# Altium PCB 19 CAN转接板.PcbDoc
Units mil, origin at the board's own origin, x right, y up, seen from the top; angles counter-clockwise.
Board outline 1291.02 x 1512.03 mil, 2 copper layers (Top Layer, Bottom Layer); 64 components, 83 nets, 240 pads, 115 vias.
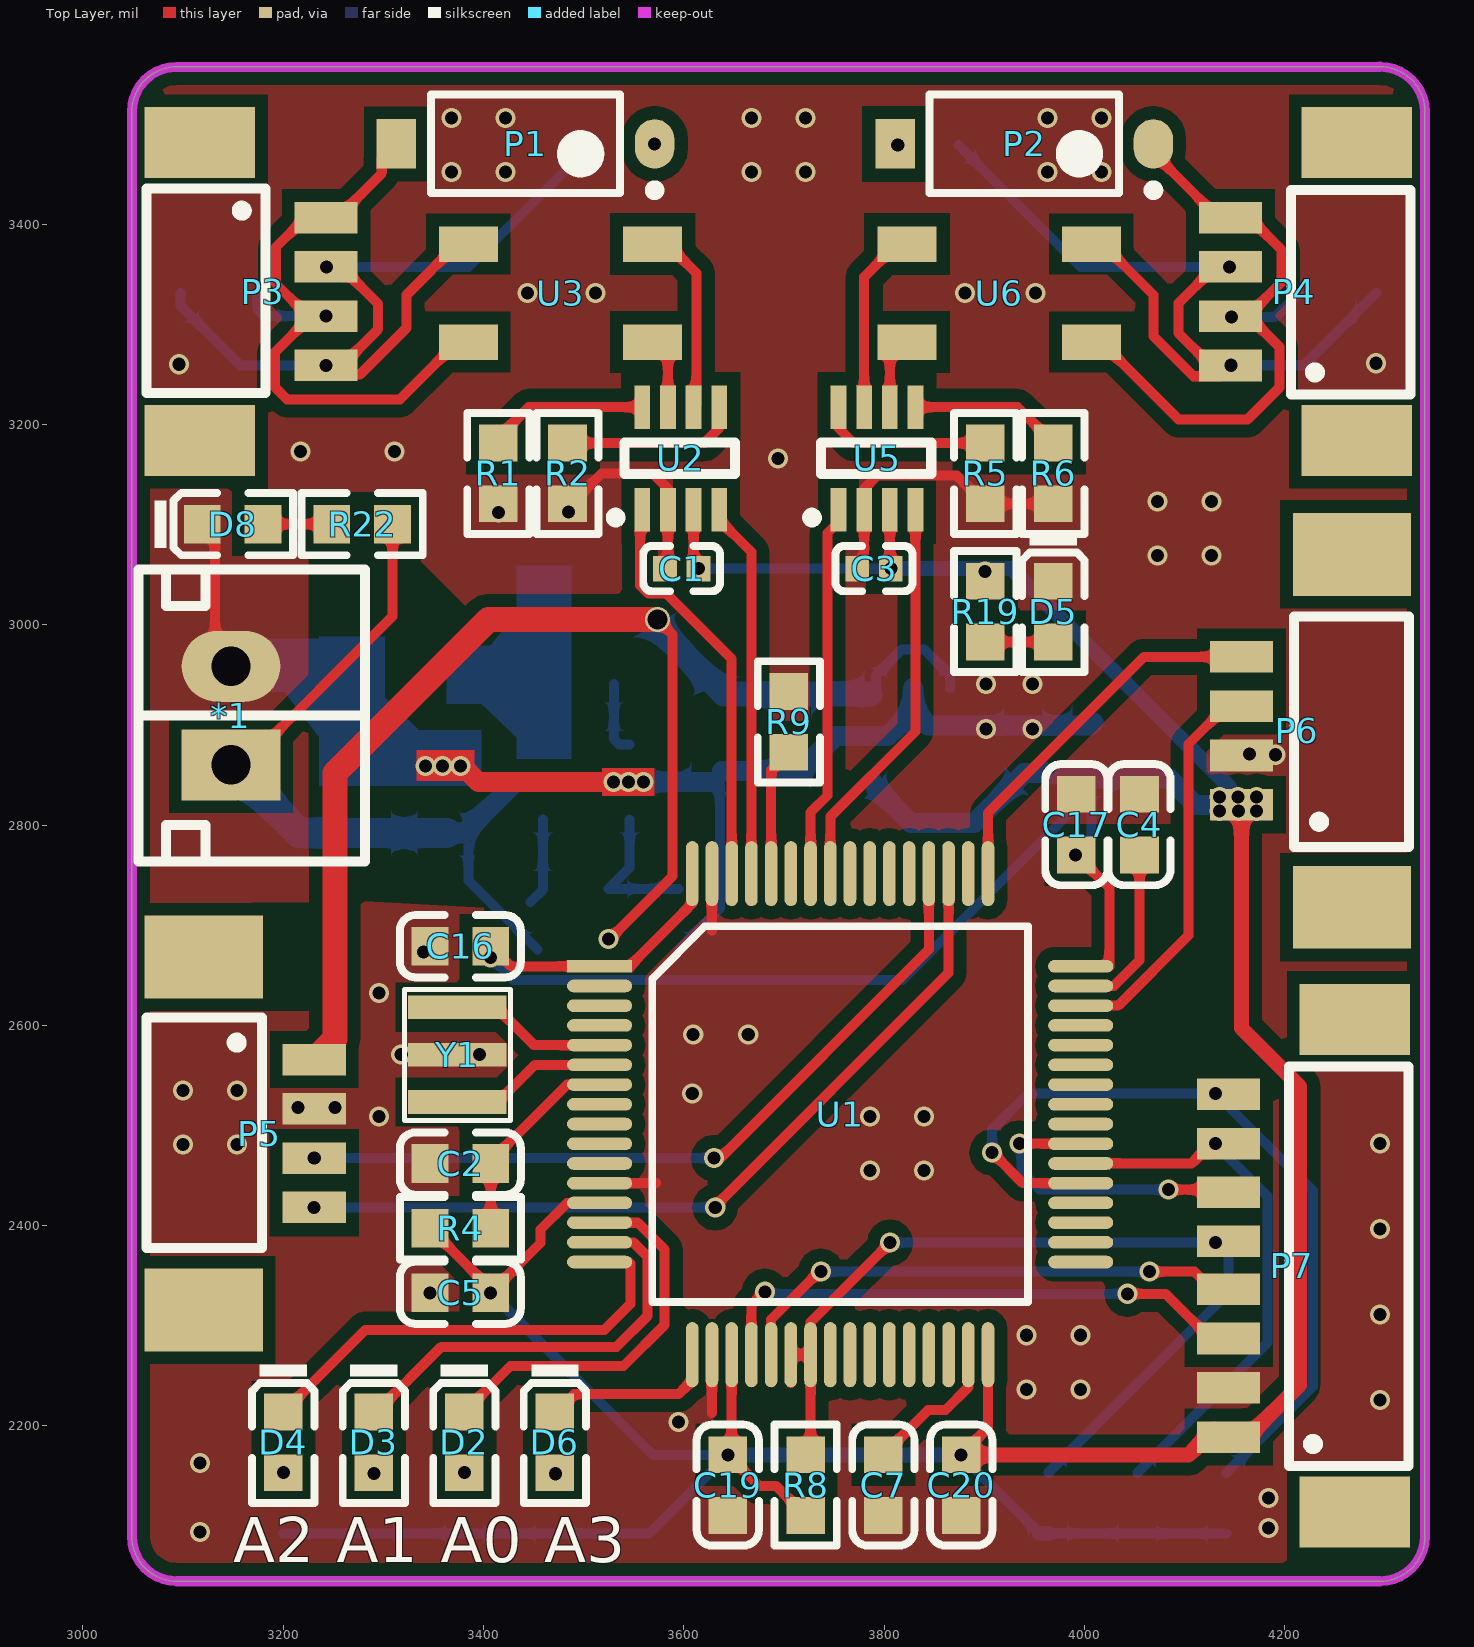
[diagram p0: Top Layer view]
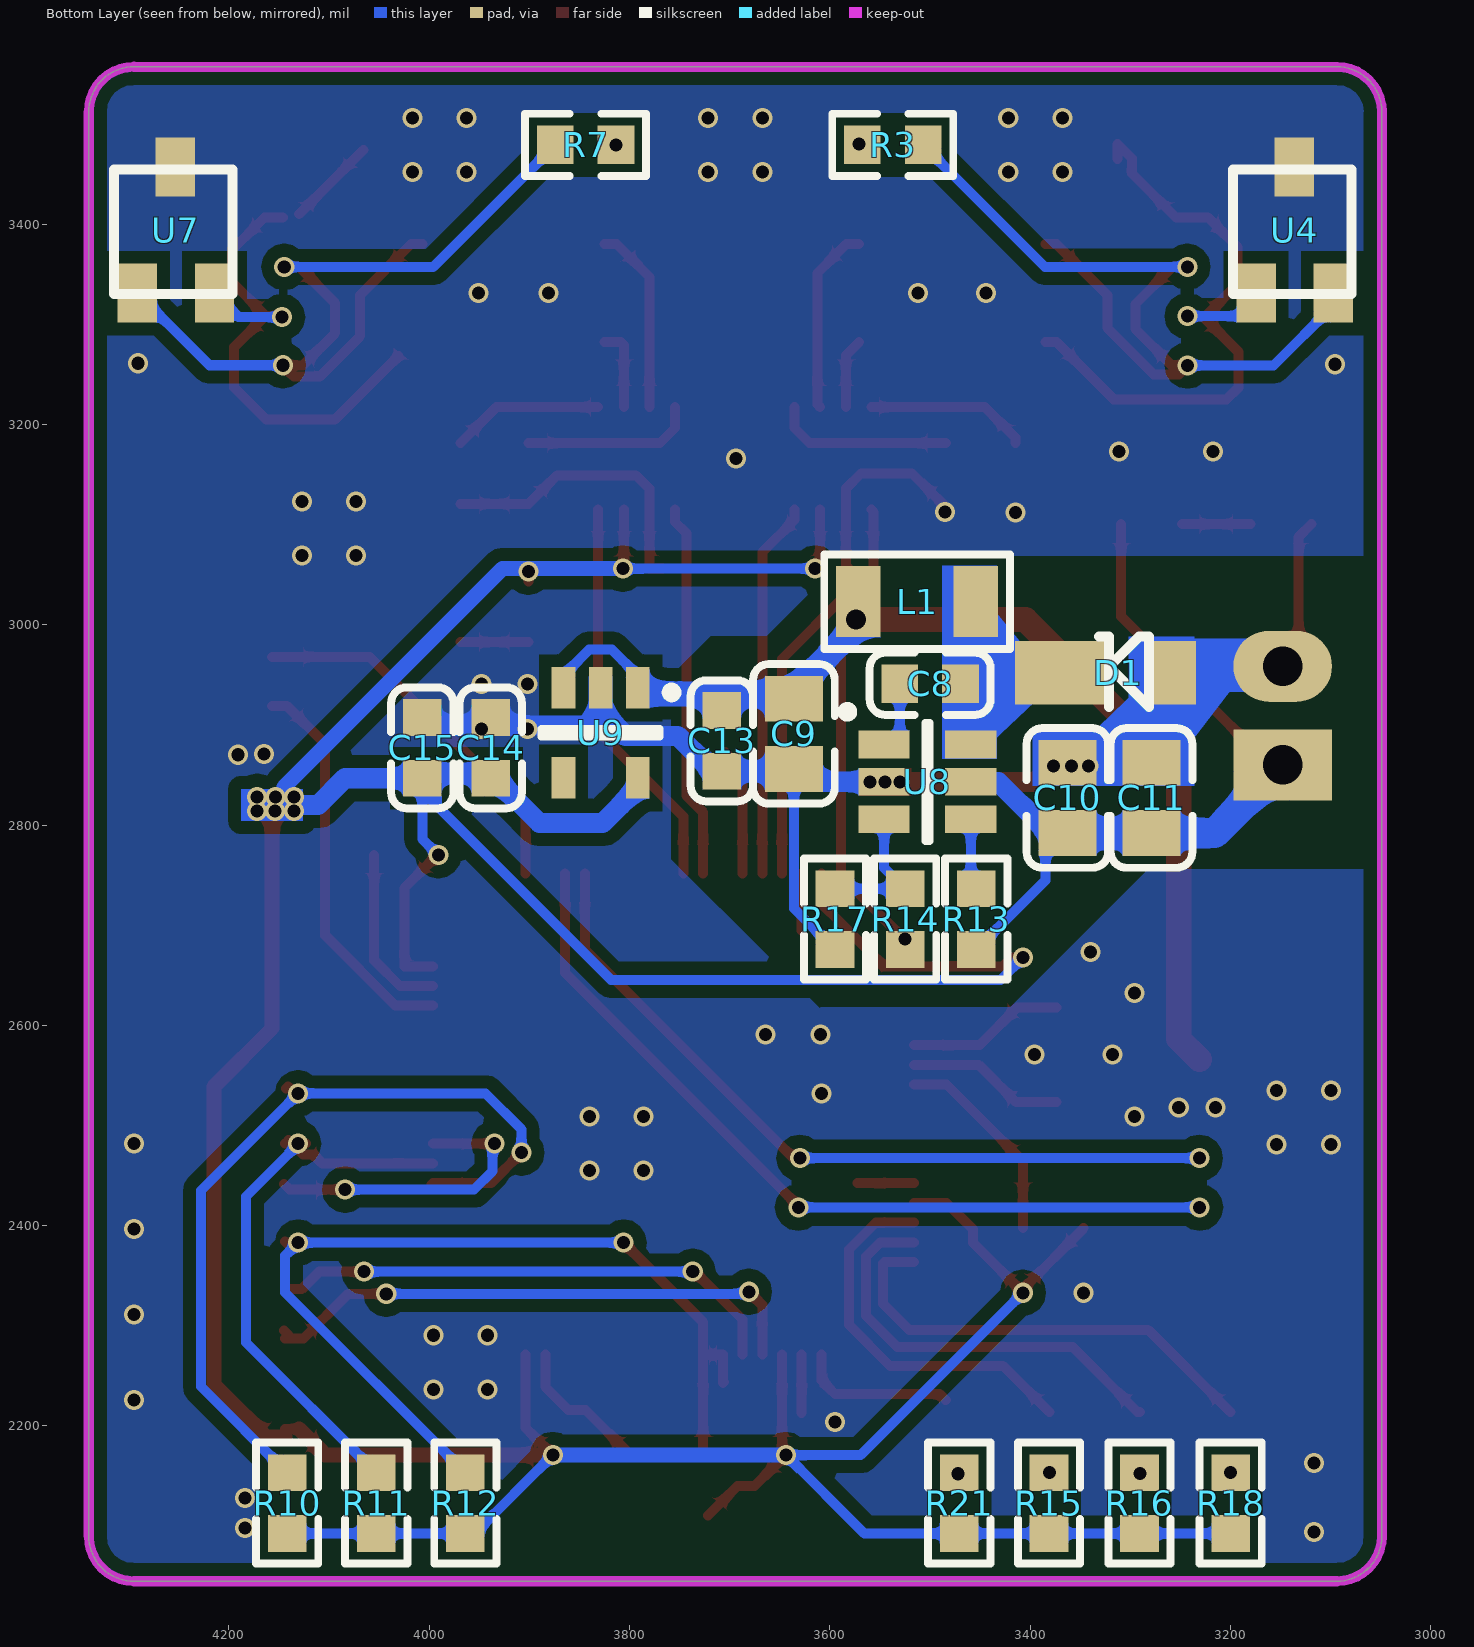
[diagram p1: Bottom Layer view, seen from below]
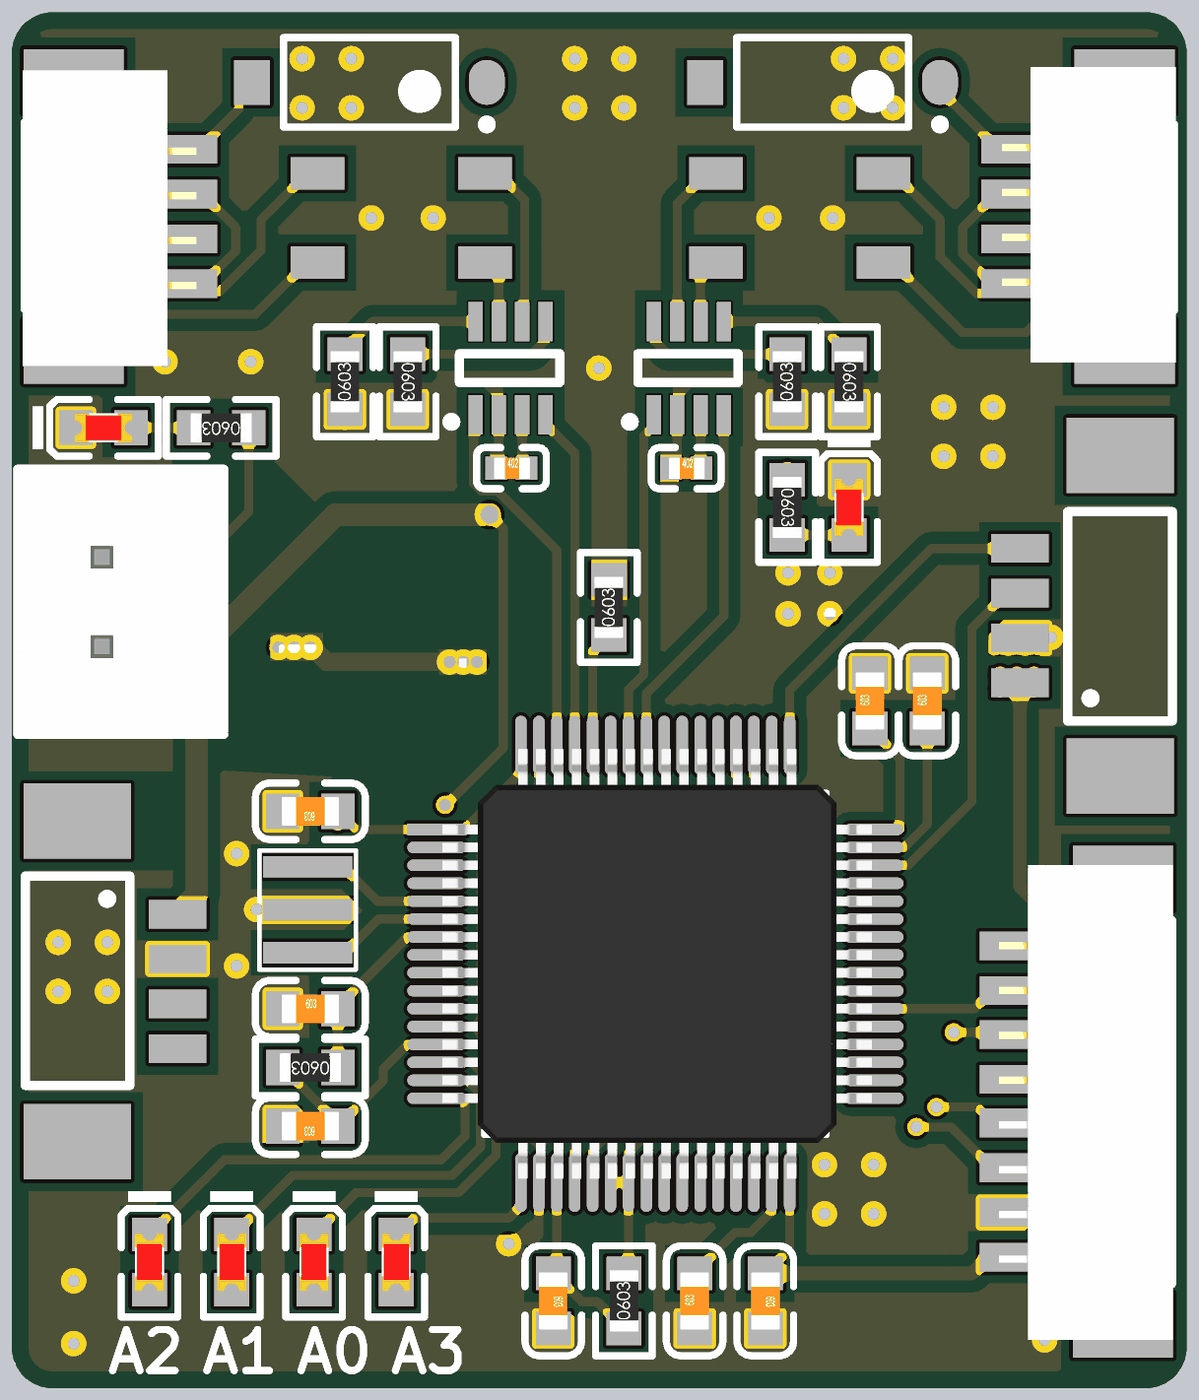
[diagram p2: 3D render of the assembled board from above, using the file's embedded part models]
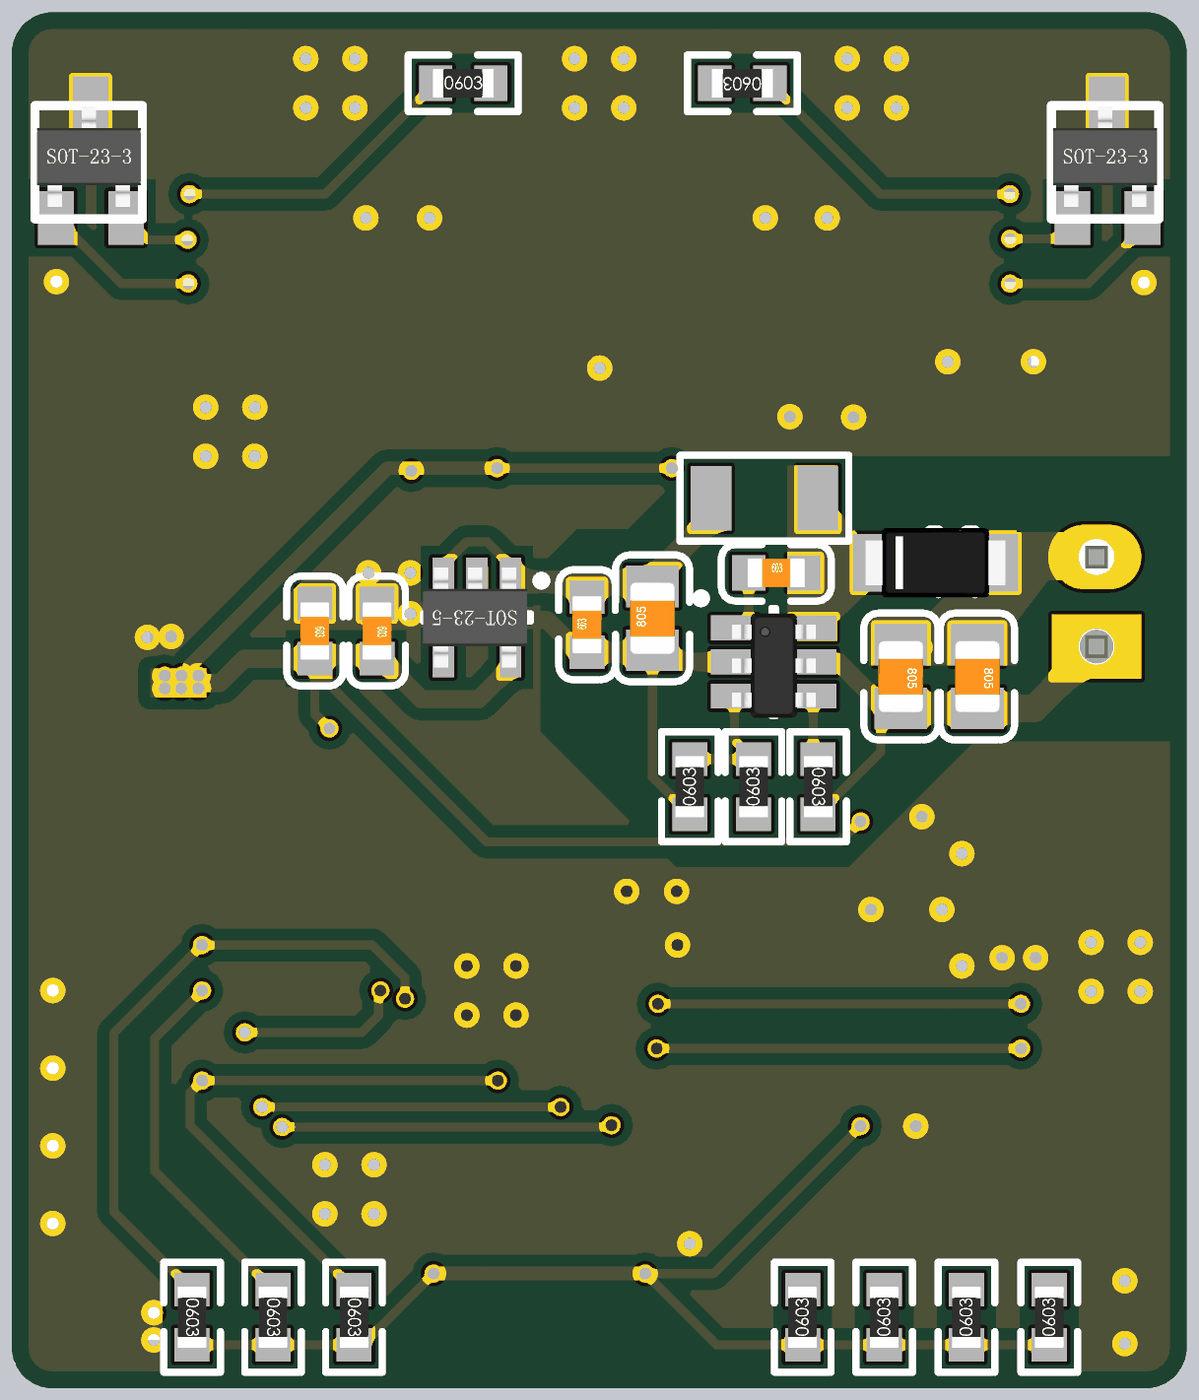
[diagram p3: 3D render of the assembled board from below, using the file's embedded part models]

## Layer stack, top to bottom
Top Solder: solder mask 0.4, Solder Resist, Dk 3.5
Top Layer: signal copper 1.4
Dielectric 1: dielectric 12.6, FR-4, Dk 4.8
Bottom Layer: signal copper 1.4
Bottom Solder: solder mask 0.4, Solder Resist, Dk 3.5

## Board outline
3049,2090 3049,3512 cw(c3093.99,3512) 3093.99,3556.99 3093.99,3557 4295,3557 4295,3557.01 cw(c4295,3512) 4340.02,3512 4340.01,3512 4340.01,2090 4340.02,2090 cw(c4295,2090) 4295,2044.98 3094.01,2044.98 cw(c3094.01,2090)

## Design rules (kind name [scope] priority, off if disabled: settings)
Clearance [All] p1: gap=7 ignorepadtopadclearanceinfootprint=FALSE except(0: Arc-Hole Track-Hole SMDPad-Hole THPad-Hole Via-Hole Fill-Hole Region-Hole Text-Hole; 13: Arc-Poly Track-Poly SMDPad-Poly THPad-Poly Via-Poly Fill-Poly Poly-Poly Poly-Region Poly-Text Poly-Hole)
PlaneConnect [All] p1: planeconnectstyle=Direct reliefexpansion=20 reliefentries=4 reliefconductorwidth=10 reliefairgap=10
PolygonConnect [All] p1: connectstyle=Direct reliefconductorwidth=10 reliefentries=4 polygonreliefangle="90 Angle" airgapwidth=10
RoutingVias [All] p1: holewidth=13 width=20 viastyle="Through Hole" minholewidth=13 minwidth=20 maxholewidth=28 maxwidth=50
SolderMaskExpansion [All] p1: expansion=4
Width [All] p1: maxlimit=50 minlimit=10 preferedwidth=10 minimp=50.000000 maximp=50.000000 favimp=50.000000
29 further rules are at their usual default settings.

## Components (designator, comment, footprint, x,y, rotation, side; value= is the part's Value field where it differs from the comment)
*1 "24V" J-XH-2A 3148,2860 r90 top
C1 "104" 0402_C 3598,3056 r0 top
C2 "104" 0603_C 3377,2462 r0 top value=0.1uF
C3 "104" 0402_C 3790,3056 r0 top
C4 "225" 0603_C 4055,2800.32 r90 top value=2.2uF
C5 "104" 0603_C 3377,2333 r180 top value=0.1uF
C7 "225" 0603_C 3799.33,2141 r90 top value=2.2uf
C8 "104" 0603_C 3500,2941 r180 bottom
C9 "106" 0805_C 3636,2891.04 r90 bottom
C10 "106" 0805_C 3363,2827 r270 bottom
C11 "104" 0805_C 3279,2827 r270 bottom
C13 "104" 0603_C 3708,2884 r90 bottom
C14 "226" 0603_C 3938.66,2877 r270 bottom
C15 "104" 0603_C 4007,2877 r270 bottom
C16 "104" 0603_C 3377,2679 r180 top value=10uF
C17 "104" 0603_C 3992,2800.32 r90 top value=0.1uF
C19 "104" 0603_C 3644,2141 r270 top value=0.1uF
C20 "104" 0603_C 3877,2141 r270 top value=0.1uF
D1 "SBR3U40P1" D-POWERDI123 3312,2950 r0 bottom
D2 "0805" 0603_LED_S1 3381.04,2183.69 r270 top
D3 "0805" 0603_LED_S1 3290.66,2183.69 r270 top
D4 "0805" 0603_LED_S1 3200.28,2183.69 r270 top
D5 "WH" 0603_LED_S1 3969,3013 r270 top
D6 "0805" 0603_LED_S1 3471.42,2183.69 r270 top
D8 "GR" 0603_LED_S1 3149.65,3100.38 r0 top
L1 "LQH3NPN4R7NGOL/4.7UH" 1206_L 3513,3023 r0 bottom value=4.7uh
P1 "Header 2H" "拨码开关贴片1位 小" 3442,3480 r180 top
P2 "Header 2H" "拨码开关贴片1位 小" 3940,3480 r180 top
P3 "CAN" J-GH-4P 3228.79,3473.33 r270 top locked
P4 "CAN" J-GH-4P 4160.13,3191.85 r90 top locked
P5 "串口" J-1.27-4P 3176,2492 r270 top locked
P6 "下载口" J-1.27-4P 4212,2894 r90 top locked
P7 "Header 8" J-GH-8P 4207,2360 r90 top locked
R1 "22k" 0603_R 3415,3151 r90 top
R2 "24k" 0603_R 3484,3151 r270 top
R3 "121" 0603_R 3537.31,3479 r0 bottom
R4 "1k" 0603_R 3377,2397.5 r180 top
R5 "22k" 0603_R 3901,3151 r90 top
R6 "24k" 0603_R 3969,3151 r270 top
R7 "121" 0603_R 3844,3479 r180 bottom
R8 "1K" 0603_R 3721.67,2141 r90 top
R9 "1K" 0603_R 3705,2903 r90 top
R10 "10K" 0603_R 4142,2123 r270 bottom value=1K
R11 "10K" 0603_R 4053,2123 r270 bottom value=1K
R12 "10K" 0603_R 3964,2123 r270 bottom value=1K
R13 "100K" 0603_R 3454,2706 r270 bottom
R14 "124k" 0603_R 3525,2706 r90 bottom
R15 "1K" 0603_R 3381.33,2123 r90 bottom
R16 "1K" 0603_R 3291,2123 r90 bottom
R17 "23.7K" 0603_R 3595,2706 r90 bottom
R18 "1K" 0603_R 3200,2123 r90 bottom
R19 "1K" 0603_R 3901,3013 r270 top
R21 "1K" 0603_R 3471,2123 r90 bottom
R22 "100K" 0603_R 3279,3100.38 r180 top
U1 "STM32F405RGT6" LQFP-64 3756.16,2511.32 r0 top locked
U2 "MAX3051" SOT-23-8 3597,3166 r270 top
U3 "ACT45B-110-2P-TL003" ACT45B 3477,3331 r180 top
U4 "PESD2CAN" SOT-233 3136,3394 r180 bottom
U5 "MAX3051" SOT-23-8 3793,3166 r270 top
U6 "ACT45B-110-2P-TL003" ACT45B 3915,3331 r0 top locked
U7 "PESD2CAN" SOT-233 4253,3394 r180 bottom
U8 "MP2451" SOT-236 3585.73,2911 r180 bottom
U9 "spx3819" SOT-235 3829,2892 r270 bottom
Y1 "8M" X-CSTCE8M 3375,2571 r270 top

## Footprints (in the part's own frame and the unit in brackets; to place one, negate y for a bottom-side part, rotate by r counter-clockwise, add the part's x,y. Pads: shape width x height; smd on the part's side, far side on the other; paste and mask are expansions set on the pad)
0402_C [mm]
  rect 0.6x0.65 smd mask+0.051: 1(-0.425,0) 2(0.425,0)
  silkscreen extent -0.97,-0.58 0.97,0.58, body extent -0.48,-0.3 0.52,0.3, height 0.2
0603_C [mm]
  rect 0.93x0.98 smd: 1(-0.77,0) 2(0.77,0)
  silkscreen extent -1.53,-0.79 1.54,0.79, body extent -0.8,-0.4 0.8,0.4, height 0.3
0603_LED_S1 [mm]
  rect 0.93x0.98 smd: A(0.77,0) K(-0.77,0)
  silkscreen extent -1.97,-0.79 1.54,0.79, body extent -0.8,-0.4 0.8,0.4, height 0.6
0603_R [mm]
  rect 0.93x0.98 smd: 1(-0.77,0) 2(0.77,0)
  silkscreen extent -1.53,-0.79 1.54,0.79, body extent -0.85,-0.4 0.85,0.4, height 0.56
0805_C [mm]
  rect 1.16x1.47 smd: 1(-0.89,0) 2(0.89,0)
  silkscreen extent -1.77,-1.04 1.77,1.04, body extent -1,-0.63 1,0.62, height 0.77
1206_L [mm]
  rect 1.13x1.8 smd: 1(-1.49,0) 2(1.49,0)
  silkscreen extent -2.36,-1.2 2.35,1.2
ACT45B [mil]
  rect 59.06x35.43 smd: 1(-92,-49) 2(92,-49) 3(92,49) 4(-92,49)
D-POWERDI123 [mil]
  rect 43.31x62.99 smd: 1(-56,-2)
  rect 94.49x62.99 smd: 2(56,-2)
  silkscreen extent -30,-38 20,32, body extent -64,-40 90,36, height 43
J-1.27-4P [mm]
  rect 2.1x3 smd: 0(-4.475,-1.401) 0(4.475,-1.401)
  rect 0.8x1.6 smd: 1(-1.875,1.401) 2(-0.625,1.401) 3(0.625,1.401) 4(1.875,1.401)
  silkscreen extent -2.94,-2.85 2.9,0.07, body extent -4.99,-3.6 5.06,2.1, height 3.67
J-GH-4P [mm]
  rect 1.8x2.8 smd: 0(-0.199,-2.841) 0(7.349,-2.839)
  rect 0.8x1.6 smd: 1(1.699,0.361) 2(2.949,0.361) 3(4.199,0.361) 4(5.449,0.361)
  silkscreen extent 0.97,-4.2 6.15,-1.18, body extent -0.5,-4.27 7.75,0.58, height 4.25
J-GH-8P [mm]
  rect 1.8x2.8 smd: 0(-6.244,-1.601) 0(6.245,-1.601)
  rect 0.8x1.6 smd: 1(-4.346,1.601) 2(-3.096,1.601) 3(-1.846,1.601) 4(-0.596,1.601) 5(0.618,1.601) 6(1.868,1.601) 7(3.094,1.601) 8(4.344,1.601)
  silkscreen extent -5.08,-2.96 5.05,0.06, body extent -6.65,-3 6.6,1.85, height 4.45
J-XH-2A [mm]
  rect 1.8x2.5 hole 1: 1(0,0)
  oval 1.8x2.5 hole 1: 2(2.5,0)
  silkscreen extent -2.45,-3.4 4.95,2.35, body extent -2.45,-3.4 4.95,2.35, height 7
LQFP-64 [mm]
  rect 1.651x0.32 smd: 1(-6.1,3.75)
  oval 1.651x0.32 smd: 2(-6.1,3.25) 3(-6.1,2.75) 4(-6.1,2.25) 5(-6.1,1.75) 6(-6.1,1.25) 7(-6.1,0.75) 8(-6.1,0.25) 9(-6.1,-0.25) 10(-6.1,-0.75) 11(-6.1,-1.25) 12(-6.1,-1.75) 13(-6.1,-2.25) 14(-6.1,-2.75) 15(-6.1,-3.25) 16(-6.1,-3.75) 33(6.1,-3.75) 34(6.1,-3.25) 35(6.1,-2.75) 36(6.1,-2.25) 37(6.1,-1.75) 38(6.1,-1.25) 39(6.1,-0.75) 40(6.1,-0.25) 41(6.1,0.25) 42(6.1,0.75) 43(6.1,1.25) 44(6.1,1.75) 45(6.1,2.25) 46(6.1,2.75) 47(6.1,3.25) 48(6.1,3.75)
  oval 0.32x1.651 smd: 17(-3.75,-6.1) 18(-3.25,-6.1) 19(-2.75,-6.1) 20(-2.25,-6.1) 21(-1.75,-6.1) 22(-1.25,-6.1) 23(-0.75,-6.1) 24(-0.25,-6.1) 25(0.25,-6.1) 26(0.75,-6.1) 27(1.25,-6.1) 28(1.75,-6.1) 29(2.25,-6.1) 30(2.75,-6.1) 31(3.25,-6.1) 32(3.75,-6.1) 49(3.75,6.1) 50(3.25,6.1) 51(2.75,6.1) 52(2.25,6.1) 53(1.75,6.1) 54(1.25,6.1) 55(0.75,6.1) 56(0.25,6.1) 57(-0.25,6.1) 58(-0.75,6.1) 59(-1.25,6.1) 60(-1.75,6.1) 61(-2.25,6.1) 62(-2.75,6.1) 63(-3.25,6.1) 64(-3.75,6.1)
  silkscreen extent -4.76,-4.77 4.76,4.77, body extent -5.95,-6 6.05,6, height 1.6
SOT-23-8 [mm]
  rect 1.1x0.4 smd mask+0.051: 1(1.3,-0.975) 2(1.3,-0.325) 3(1.3,0.325) 4(1.3,0.975) 5(-1.3,0.975) 6(-1.3,0.325) 7(-1.3,-0.325) 8(-1.3,-0.975)
  silkscreen extent -0.4,-1.77 1.62,1.38
SOT-233 [mil]
  rect 39.37x59.06 smd: 1(-38.5,-63) 2(38.5,-63) 3(-0.5,63)
  silkscreen extent -62,-64 57,60, body extent -60,-51 55,59, height 47
SOT-235 [mm] "SOT23, 5-Leads, Body 3.0x2.6mm (max), Pitch 0.95mm, IPC Medium Density"
  rect 1.05x0.6 smd: 1(-1.143,0.94) 2(-1.143,0) 3(-1.143,-0.94) 4(1.143,-0.94) 5(1.143,0.94)
  silkscreen extent -1.15,-1.5 0.1,1.92, body extent -1.4,-1.5 1.4,1.4, height 1.2
SOT-236 [mm]
  rect 1.3x0.7 smd: 1(1.008,-0.777) 2(1.008,-1.727) 3(1.008,-2.677) 4(3.208,-2.677) 5(3.208,-1.727) 6(3.208,-0.777)
  silkscreen extent -0.05,-3.23 2.16,0.18, body extent 0.94,-3.29 3.28,-0.37, height 1
X-CSTCE8M [mm]
  rect 0.6x2.5 smd: 1(-1.194,-0.025) 2(0.006,-0.025) 3(1.206,-0.025)
  silkscreen extent -1.65,-1.37 1.68,1.32, body extent -1.6,-1.07 1.63,0.97, height 1
"拨码开关贴片1位 小" [mm] "SOIC, 2-Leads, Body 2.50x5.60mm, Pitch 1.27mm, IPC Low Density"
  oval 1x1.25 smd: 1(-3.275,0)
  rect 1x1.25 smd: 2(3.275,0)
  silkscreen extent -3.4,-1.25 2.4,1.3, body extent -2.8,-1.25 2.8,1.25, height 2.65

## Part data
*1: library part 插件
C1 C3 C8 C13 C15: library part "0603 100nF (104) 10% 50V", "贴片电容", Package=0603, SuppliersPartNumber=C14663, ComponentLink1Description=供应, ComponentLink1URL=http://www.szlcsc.com/product/details_15331.html, Supplier=LC
C2 C4 C5 C7 C16 C17 C19 C20: library part Cap, "Capacitor"
C9 C10: library part "0805 10uF (106) 10% 25V", "贴片电容", Package=0805, SuppliersPartNumber=C15850, ComponentLink1Description=供应, ComponentLink1URL=http://www.szlcsc.com/product/details_16532.html, Supplier=LC
C11: library part "0805 100nF(104) 10% 50V", "贴片电容", Package=0805, SuppliersPartNumber=C49678, ComponentLink1Description=供应, ComponentLink1URL=http://www.szlcsc.com/product/details_50686.html, Supplier=LC
C14: library part "0603 22uF (226) 20% 6.3V", "贴片电容", Package=0603, SuppliersPartNumber=C59461, ComponentLink1Description=供应, ComponentLink1URL=http://www.szlcsc.com/product/details_60514.html, Supplier=LC
D1: library part "D Zener", "Zener Diode"
D2 D3 D4 D6: library part "0805 蓝灯", "发光二极管", SuppliersPartNumber=C2293, ComponentLink1Description=供应, ComponentLink1URL=http://www.szlcsc.com/product/details_2666.html, Package=0805, Supplier=LC
D5 D8: library part "0805 白灯", "发光二极管", Package=0805, SuppliersPartNumber=C34499, ComponentLink1Description=供应, ComponentLink1URL=http://www.szlcsc.com/product/details_35468.html, Supplier=LC
L1: library part Inductor, "4.7uh", Code_IEC=1005, Code_JEITA=0402
P1 P2: "Header, 2-Pin, Right Angle", LatestRevisionDate=17-Jul-2002, LatestRevisionNote="Re-released for DXP Platform.", Publisher="Altium Limited"
P3 P4: library part J-4PIN, "Header, 4-Pin"
P5 P6: library part "Header 4", "Header, 4-Pin"
P7: "Header, 8-Pin", LatestRevisionDate=17-Jul-2002, LatestRevisionNote="Re-released for DXP Platform.", Publisher="Altium Limited"
R1 R2 R3 R5 R6 R7: library part "0603 120Ω (1200) 1%", "贴片电阻", Package=0603, SuppliersPartNumber=C22787, ComponentLink1URL=http://www.szlcsc.com/product/details_23514.html, Supplier=LC
  R1 R2 R5 R6: ComponentLink1Description=供应
  R3 R7: ComponentLink1Description=供应商
R4: library part "Res Semi", "Semiconductor Resistor", PackageDescription="Axial Device, Thru-Hole; 2 Leads; 0.5 in Pin Spacing"
R8 R9 R15 R16 R17 R18 R21: library part Res2, "Resistor"
R10 R11 R12 R19: library part "0603 1KΩ (1001) 1%", "贴片电阻", Package=0603, SuppliersPartNumber=C21190, ComponentLink1URL=http://www.szlcsc.com/product/details_21904.html, Supplier=LC
  R10 R11 R12: ComponentLink1Description=供应商
  R19: ComponentLink1Description=供应
R13: library part "0603 100KΩ (1003) 1%", "贴片电阻", Package=0603, SuppliersPartNumber=C25803, ComponentLink1Description=供应, ComponentLink1URL=http://www.szlcsc.com/product/details_26546.html, Supplier=LC
R14: library part Res2
R22: library part "0603 10KΩ (1002) 1%", "贴片电阻", Package=0603, SuppliersPartNumber=C25804, ComponentLink1Description=供应, ComponentLink1URL=http://www.szlcsc.com/product/details_26547.html, Supplier=LC
U1: library part STM32F405RGT7
U2 U5: library part MAX3051EKA
U3 U6: library part 扼流线圈, "B82793C0/S0"
U9: library part spx5205, "spx5205"
Y1: library part TXAL-3

## Via types
v1: diameter 20, hole 13, Top Layer to Bottom Layer, 114 vias
v2: diameter 25, hole 20, Top Layer to Bottom Layer, 1 vias

## Nets (pads, with @x,y where several pads share a name; then routed paths per layer and width w, separated by ;. In a path a pad name is that pad's centre, name@x,y a point inside that pad or via, vN(x,y) a via of type N, cw(c..) or ccw(c..) an arc to the next point about the centre after c; other vN are vias at no path point)
3V3: C1.2 C3.2 C5.1 C14.2 C15.2 C16.1 C17.1 C19.1 C20.1 P6.1 P7.1 R4.2 R8.1 R10.2 R11.2 R12.2 R15.1 R16.1 R18.1 R19.1 R21.1 U1.1 U1.13 U1.19 U1.32 U1.48 U1.64 U2.3 U5.3 U9.5 | length 5211.5
  Top Layer w10: R4.2 3407.32,2336.87 v1(3407.32,2333) 3457,2382.68 3457,2396.13 3483.61,2422.74 U1.13 ; v1(3407.32,2667.8) 3418.51,2667.8 3427.36,2658.96 U1.1 3545.96,2658.96 3608.52,2721.52 U1.64 ; U2.3 3609.8,3060.94 v1(3614.73,3056) ; C19.1@3644.16,2171.16 3675.32,2140 3692.35,2140 R8.1 ; C19.1@3647.89,2175.21 U1.19 ; C3.2@3805.8,3061.06 U5.3 ; v1(3876.68,2171) C20.1 3903.8,2198.11 U1.32 ; R19.1 v1(3901,3053) ; v1(3991,2770) C17.1 4025,2737 4025,2658.96 U1.48 ; P7.1@4129.9,2196.9 P7.1@4143.97,2196.9
  Top Layer w15: v1(3876.68,2171) 4104,2171 P7.1@4129.9,2196.9 ; P7.1 4162.9,2188.9 4215,2241 4215,2539 4156.86,2597.14 P6.1
  Bottom Layer w10: R18.1 R16.1 R15.1 R21.1 3565.69,2092.69 v1(3644,2171) 3569.32,2171 v1(3407.32,2333) ; v1(3407.32,2667.8) 3429.74,2645.38 3818.38,2645.38 C15.2@4007,2834 ; v1(3614.73,3056) v1(3806.73,3056) ; U9.5@3792,2837 U9.5 ; v1(3876.68,2171) R12.2@3955,2092.68 ; R12.2 R11.2 R10.2 ; v1(3991,2770) 4007,2786 C15.2@4007,2834 ; C15.2 C15.2@4007,2834 ; v1(4135,2828) 4145,2838
  Bottom Layer w15: v1(3644,2171) v1(3876.68,2171) ; v1(3806.73,3056) 3927,3056 4145,2838 ; R12.2@3955,2092.68 R12.2
  Bottom Layer w20: U9.5@3792,2837 3827,2802 3889.98,2802 3939.66,2851.68 C15.2@4016,2851.68 ; C15.2 4084.32,2846.68 4111,2820 v1@4156,2820
  other v1: 4135,2814 4154,2814 4172,2814 4153.5,2828 4172,2828
+5V: C9.2 C13.2 L1.2 P5.1 R14.1 U9.1 U9.3 | length 1383.6
  Top Layer w10: v1@3531.84,2691.84 3567,2727 3589,2749 3589,2990 v2(3574,3005)
  Top Layer w25: P5.1 3251.79,2586.47 3251.79,2851.79 3405,3005 v2@3567,3005
  Bottom Layer w10: U9.1 3792,2949.45 3817.55,2975 3840.45,2975 3866,2949.45 U9.3
  Bottom Layer w25: v2(3574,3005) 3574,2997 3640,2931 U9.1@3786,2931
  other v1: 3525,2686
+24V: *1.1 C10.2 C11.2 R13.2 R22.1 U8.5 | length 807.4
  Top Layer w10: *1.1 3161,2860 3309.31,3008.31 R22.1
  Bottom Layer w10: C10.2@3385,2778.96 3385,2744.68 R13.2
  Bottom Layer w20: C10.2 3380.96,2791.96 3432,2843 U8.5
  Bottom Layer w30: *1.1 3216.04,2791.96 C11.2 C10.2
B: U1.56
C: U1.55
CAN1H: U2.7 U3.4 | length 70.3
  Top Layer w10: U3.4@3571,3282 3584.2,3268.8 U2.7
CAN1H1: P1.2 P3.1 P3.3 U3.3 U4.1 | length 681.8
  Top Layer w10: v1(3242.99,3308.01) P3.3@3227.99,3308.01 ; P1.2@3313.06,3465.06 P1.2 3298.5,3465.44 3298.5,3450.5 3254.44,3406.44 P3.1 3222.44,3406.44 3193,3377 3193,3340 3224.99,3308.01 P3.3@3227.99,3308.01 ; U3.3 3373.68,3282 3316.68,3225 3204,3225 3192,3237 3192,3272.03 P3.3@3227.99,3308.01
  Bottom Layer w10: U4.1 3174.5,3314.5 3180.99,3308.01 v1(3242.99,3308.01)
CAN1L: U2.6 U3.1 | length 188.6
  Top Layer w10: U3.1@3571,3380 3583.69,3380 3612.53,3351.16 3612.53,3219.91 U2.6
CAN1L1: P3.2 P3.4 R3.1 U3.2 U4.2 | length 875.3
  Top Layer w10: P3.2 v1(3243.22,3357.22) 3257.99,3357.22 3295,3320.21 3295,3295 3258.8,3258.8 v1(3242.99,3258.8) 3251.79,3250 3277,3250 3323,3296 3323,3329 3374,3380 U3.2
  Bottom Layer w10: U4.2 3097.5,3318.5 3157.2,3258.8 v1(3242.99,3258.8) ; v1(3243.22,3357.22) 3385.22,3357.22 R3.1
CAN2H: U5.7 U6.4 | length 188.4
  Top Layer w10: U5.7 3780.2,3347.2 3813,3380 U6.4@3825,3380
CAN2H1: P4.1 P4.3 R7.1 U6.3 U7.1 | length 880.9
  Top Layer w10: U6.3 4018.2,3380 4069,3329.2 4069,3288 4109,3248 4135.19,3248 P4.1 ; P4.3 v1(4144.83,3357.17) 4130.17,3357.17 4094,3321 4094,3291 4126.25,3258.75 P4.1 ; v1(4146.19,3259) P4.1
  Bottom Layer w10: R7.1 3996.15,3357.17 v1(4144.83,3357.17) ; v1(4146.19,3259) 4219.5,3259 U7.1
CAN2L: U5.6 U6.1 | length 82.3
  Top Layer w10: U5.6 3805.8,3279.06 3808.73,3282 U6.1@3825,3282
CAN2L1: P2.1 P4.2 P4.4 U6.2 U7.2 | length 619.3
  Top Layer w10: U6.2@4031,3268 4094,3205 4163,3205 4195,3237 4195,3277 4164.04,3307.96 P4.2@4162.96,3307.96 ; P2.1@4065.94,3474 P4.4@4129.94,3410 ; P4.4 4164.62,3406.38 4197,3374 4197,3342 P4.2@4162.96,3307.96 ; v1(4146.89,3307) P4.2 P4.2@4162.96,3307.96
  Bottom Layer w10: v1(4146.89,3307) 4190.5,3307 U7.2
GND: *1.2 C1.1 C2.1 C3.1 C4.2 C5.2 C7.1 C9.1 C10.1 C11.1 C13.1 C14.1 C15.1 C16.2 C17.2 C19.2 C20.2 D1.1 D5.K D8.K P5.2 P6.2 P7.2 R1.1 R2.2 R5.1 R6.2 R9.2 R17.1 U1.12 U1.18 U1.63 U2.2 U4.3 U5.2 U7.3 U8.2 U9.2 Y1.2 | length 1712.3
  Top Layer w10: D8.K 3132,3087.71 3132,2974.43 *1.2 ; R2.2@3487.68,3120.68 3518,3151 3568.93,3151 3584.2,3135.73 U2.2 3584.2,3058.94 C1.1 ; U1.12 3572.43,2442.43 ; 3628.2,2213.2 U1.18 ; 3628.2,2694.68 U1.63 ; C3.1@3767.27,3056 C3.1 3780.2,3056 U5.2 3780.2,3135.73 3793.48,3149 3872.68,3149 R5.1 R6.2
  Top Layer w20: v1@3377,2861 3395,2843 v1(3530,2843) v1(3545,2843)
  Bottom Layer w10: R17.1 3636,2716.69 C9.1
  Bottom Layer w20: U8.2 v1(3560,2843) C9.1@3627.63,2843 ; C9.1@3638.32,2853.68 C13.1 3716.68,2853.68 3752,2889 3804,2889 3829,2914 ; U9.2 3829,2914 ; C15.1@4009,2902.32 4006.02,2899.33 3843.67,2899.33 3829,2914
  Bottom Layer w30: *1.2 *1.2@3156.43,2950
  other v1: 3116.92,2094 4184,2098 4184,2128 3116.92,2163 3595,2203.76 4295,2226 3942,2236.58 3996,2236.58 3942,2290.58 3996,2290.58 4295,2311.33 3346.68,2333 4295,2396.67 3786,2455 3840,2455 3100,2481 3154,2481 4295,2482 3296,2509 3786,2509 3840,2509 3215,2518 3251.79,2518 3608.52,2532 3100,2535 3154,2535 3318,2571 3396,2571 3609.5,2591 3664.42,2591 3296,2632.46 3340,2673 3342,2859 3359,2859 3377,2859 4191,2870.14 4165,2871 3902,2896 3902,2896 3948,2896 3902,2941 3948,2941 4073,3069 4127,3069 3415,3112 3485,3112.58 4073,3123 4127,3123 3694,3166 3217.38,3173 3311.48,3173 3096,3260 4291,3261 3444,3331 3512,3331 3881,3331 3951,3331 3368,3452 3422,3452 3667.57,3452 3721.57,3452 3963,3452 4017,3452 3368,3506 3422,3506 3667.57,3506 3721.57,3506 3963,3506 4017,3506
MAGDEC: U1.30
MAGINC: U1.29
NetC2_2: C2.2 R4.1 U1.7 | length 207.3
  Top Layer w10: R4.1 C2.2 3407.31,2464.56 3483.61,2540.85 U1.7
NetC4_1: C4.1 U1.47 | length 174.4
  Top Layer w10: U1.47 4029.36,2639.28 4055,2664.92 C4.1
NetC7_2: C7.2 U1.31 | length 145.1
  Top Layer w10: C7.2 3844.02,2216 3861.34,2216 3884.11,2238.77 U1.31
NetC8_1: C8.1 U8.1 | length 73.2
  Bottom Layer w10: C8.1 3530.32,2885.68 3535.6,2880.4 U8.1
NetC8_2: C8.2 D1.2 L1.1 U8.6
NetD2_A: D2.A R15.2
  other v1: 3381.04,2153.37
NetD3_A: D3.A R16.2 | length 1.1
  Top Layer w10: v1(3290.66,2152.32) D3.A
NetD4_A: D4.A R18.2
  other v1: 3200.28,2153.37
NetD5_A: D5.A R19.2 | length 68
  Top Layer w10: R19.2 D5.A
NetD6_A: D6.A R21.2
  other v1: 3472,2152.32
NetD7_A: 
NetD8_A: D8.A R22.2 | length 68.7
  Top Layer w10: D8.A R22.2
NetP1_1: P1.1 R3.2
  other v1: 3570.94,3480
NetP2_2: P2.2 R7.2
  other v1: 3813.68,3479
NetR1_2: R1.2 U2.8 | length 161.8
  Top Layer w10: R1.2 3415,3187 3445.18,3217.18 U2.8
NetR2_1: R2.1 U2.5 | length 178.5
  Top Layer w10: R2.1 3620.43,3181.31 3635.39,3196.27 U2.5
NetR5_2: R5.2 U5.8 | length 173.5
  Top Layer w10: U5.8 3754.61,3196.27 3769.57,3181.32 R5.2
NetR6_1: R6.1 U5.5 | length 152.5
  Top Layer w10: U5.5 3933.13,3217.18 R6.1
NetR9_1: R9.1 U1.60 | length 128.6
  Top Layer w10: U1.60 3687.26,2854.95 R9.1
NetR13_1: R13.1 U8.4 | length 87.7
  Bottom Layer w10: R13.1@3447,2723 3459.38,2735.38 U8.4
NetR14_2: R14.2 R17.2 U8.3 | length 147.9
  Bottom Layer w10: U8.3 3546,2757.32 R14.2 R17.2
OSC_IN: U1.5 Y1.1 | length 157.6
  Top Layer w10: Y1.1 3413,2618 3450.78,2580.22 U1.5
OSC_OUT: U1.6 Y1.3 | length 157.3
  Top Layer w10: Y1.3 3414.51,2523.51 3451.53,2560.53 U1.6
PA0: D2.K U1.14 | length 387.3
  Top Layer w10: D2.K 3427.04,2260 3540,2260 3581,2301 3581,2376.08 3554.03,2403.05 U1.14
PA1: D3.K U1.15 | length 426.1
  Top Layer w10: D3.K 3293,2214 3358,2279 3533,2279 3564,2310 3564,2369.04 3549.67,2383.37 U1.15
PA2: D4.K U1.16 | length 463.2
  Top Layer w10: D4.K 3282.28,2296 3521,2296 3547,2322 3547,2362 3545.32,2363.68 U1.16
PA3: D6.K U1.17 | length 157.8
  Top Layer w10: D6.K@3484.42,2226 3490.42,2232 3595,2232 3608.52,2245.52 U1.17
PA11: U1.44
PA12: U1.45
PA15: U1.50
PB0_ADC8: U1.26
PB1_ADC9: U1.27
PB2: U1.28
PB5: U1.57 U5.4 | length 398.6
  Top Layer w10: U1.57 3746.32,2808.27 3831.39,2893.34 U5.4
PB6: U1.58 U5.1 | length 374.9
  Top Layer w10: U1.58 3726.63,2812.63 3743.46,2829.46 3743.46,3091.46 3754.61,3102.61 U5.1
PB8: U1.61 U2.4 | length 376.7
  Top Layer w10: U2.4 3635.39,3104.61 3667.57,3072.43 U1.61
PB9: U1.62 U2.1 | length 412.7
  Top Layer w10: U2.1 3556.38,3112.58 3556.38,3039.31 3564.69,3031 3582.65,3031 3647.89,2965.76 U1.62
PB12: U1.33
PC0: U1.8
PC1: U1.9
PC2: U1.10
PC3: U1.11
PC4: U1.24
PC5: U1.25
PC9: U1.40
PC12: U1.53
PC13: U1.2
PC14: U1.3
PC15: U1.4
PD2: U1.54
SPI1_DATA: P7.5 R8.2 R12.1 U1.22 U1.23 | length 955.6
  Top Layer w10: R8.2 3726.63,2176.28 U1.23 ; v1(3806,2383) 3726.63,2303.63 U1.23 ; P7.5@4129,2383 v1(4131,2383) 4138.64,2383 4140.64,2381 P7.5 ; U1.22@3706.95,2244 3706,2244 3706.95,2243.05 U1.22@3706.95,2244 ; U1.22@3706.95,2244 U1.22 U1.23
  Bottom Layer w10: v1(3806,2383) 3806,2384 3804,2382 3805,2381 3807,2383 v1(4131,2383) 4144,2370 4144,2333.32 R12.1
SPI1_NSS: P7.3 U1.20 | length 556.3
  Top Layer w10: U1.20 3667.57,2320.57 v1(3681,2334) ; v1(4043,2332) 4081,2332 4125.68,2287.32 P7.3 ; P7.3@4141,2291.36 P7.3@4144.97,2295.32
  Bottom Layer w10: v1(3681,2334) 3683,2332 v1(4043,2332)
SPI1_SCK: P7.4 U1.21 | length 518.8
  Top Layer w10: U1.21 3687.26,2306.26 3735,2354 v1(3737,2354) ; v1(4065,2354) 4110,2354 4127.46,2336.54 P7.4
  Bottom Layer w10: v1(3737,2354) v1(4065,2354)
TCK: P6.4 U1.49 | length 378.3
  Top Layer w10: U1.49 3903.8,2812.22 4059.39,2967.82 P6.4
TIM1_CH1: U1.41
TIM1_CH1N: U1.34
TIM1_CH2: U1.42
TIM1_CH2N: U1.35
TIM1_CH3: U1.43
TIM1_CH3N: U1.36
TIM3_CH1: P7.8 R10.1 U1.37 | length 832.9
  Top Layer w10: v1(3908,2473) 3938.57,2442.43 U1.37 U1.37@3997.7,2441.04 ; v1(4131,2532) 4127.85,2532 4130.85,2529 4140.89,2539.04 P7.8@4142.93,2537
  Bottom Layer w10: v1(3908,2473) 3908,2496.16 3943.84,2532 v1@4121,2532 ; v1(4131,2532) 4228,2435 4228,2239.32 R10.1
TIM3_CH2: P7.7 R11.1 U1.38 | length 578.6
  Top Layer w10: U1.38 4107.11,2462.11 4116,2471 4126.14,2471 P7.7@4136.97,2481.83 ; P7.7@4123,2481.83 P7.7@4136.97,2481.83 ; P7.7@4140.47,2485.33 P7.7@4136.97,2481.83 ; P7.7 P7.7@4136.97,2481.83
  Bottom Layer w10: R11.1 4183,2283.32 4183,2429.22 v1@4130.61,2481.61
  other v1: 4131,2482
TIM3_CH3: P7.6 U1.39 | length 299.9
  Top Layer w10: v1(3935,2482) 3938,2482 3938.2,2481.8 U1.39 ; v1(4084,2436) 4139.43,2436 P7.6@4144.97,2441.54
  Bottom Layer w10: v1@3937,2482 3937,2454.43 3955.43,2436 v1@4077,2436
TIM4_CH2: U1.59
TMS: P6.3 U1.46 | length 396.2
  Top Layer w10: U1.46 4033.71,2619.59 4104,2689.88 4104,2880.75 4141.86,2918.61 P6.3
USART3_RX: P5.3 U1.52 | length 775.6
  Top Layer w10: v1(3630,2467.39) 3636.39,2467.39 3844.74,2675.74 U1.52
  Bottom Layer w10: v1(3231.14,2467.39) v1(3630,2467.39)
USART3_TX: P5.4 U1.51 | length 830.3
  Top Layer w10: v1(3231,2418.32) P5.4 ; v1(3631.47,2418.32) 3631.47,2419.47 3864.43,2652.43 U1.51
  Bottom Layer w10: v1(3231,2418.32) v1(3631.47,2418.32)
pads on no net: P3.0 P4.0 P5.0 P6.0 P7.0 U9.4

## Polygon pours and split planes (outlines as drawn)
GND on Bottom Layer "GND_L02_P002" (solid, remove dead copper, pour order 2): 3029,3580 3029,2036 3039,2026 3053,2040 4352,2040 4352,3575 4355,3578
GND on Top Layer "GND_L01_P000" (solid, remove dead copper, pour order 0): 3029,3580 3029,2036 3039,2026 3053,2040 4352,2040 4352,3575 4355,3578

## Keep-outs
Keep-Out Layer:
  the board outline again, w10

## Other copper
Top Layer:
  rectangle net GND: 3518.39,2829 3570.94,2857
  rectangle net GND: 3333,2844 3391,2875
  pour cut-out: 3162,2715.79 3169.21,2723 3245,2723 3245,2647 3252,2640 3225.84,2613.84 3131.27,2613.84
  pour cut-out: 3277,2724 3224.99,2776.01 3224.99,3062.99 3281.5,3119.5 3423,2978 3571,2978 3571,2776 3572,2775 3473,2676 3445,2676 3404,2717
  pour cut-out: 3192,3120.38
Bottom Layer:
  rectangle net 3V3: 4126,2804 4188,2836
  region net NetC8_2: 3455.02,2999.95 3436.46,3015.17 3398.81,2969.26 3417.37,2954.05
  region net GND: 3326.76,2864.4 3346.21,2884.55 3291.4,2937.48 3271.95,2917.33
  region net GND: 3212.92,2963.34 3190.67,2946.34 3241.33,2880.03 3263.58,2897.02
  rectangle net GND: 3236,2839 3398,2895
  rectangle net GND: 3236,2850 3302,2988
  rectangle net GND: 3119,2933 3279,2986
  region net NetC8_2: 3438,2883 3454.45,2900.48 3411.22,2941.17 3394.77,2923.69
  rectangle net NetC8_2: 3363,2921 3488,2979
  rectangle net NetC8_2: 3433,2866 3488,3059
  pour cut-out: 3006,3063 3012,3069 3583,3069 3663,2989 3719,2989 3759,2949 3759,2766 3610,2617 3609,2618 3420,2618 3282,2756 3012,2756
  pour cut-out: 3328.09,2399.35
  pour cut-out: 3672.65,3049.04

## Silkscreen, mask and mechanical layers (free items; w line width, h text height)
Top Overlay:
  text "A2" at 3150.18,2064 h45
  text "A1" at 3253.79,2064 h45
  text "A0" at 3357.39,2064 h45
  text "A3" at 3461,2064 h45
Mechanical 1:
  lines w5: 3695,2045 3695,3556.49